# Altium PCB PCB1.PcbDoc
Units mil, origin at the board's own origin, x right, y up, seen from the top; angles counter-clockwise.
Board outline 4500 x 2355 mil, 2 copper layers (Top Layer, Bottom Layer); 17 components, 28 nets, 94 pads, 2 vias.
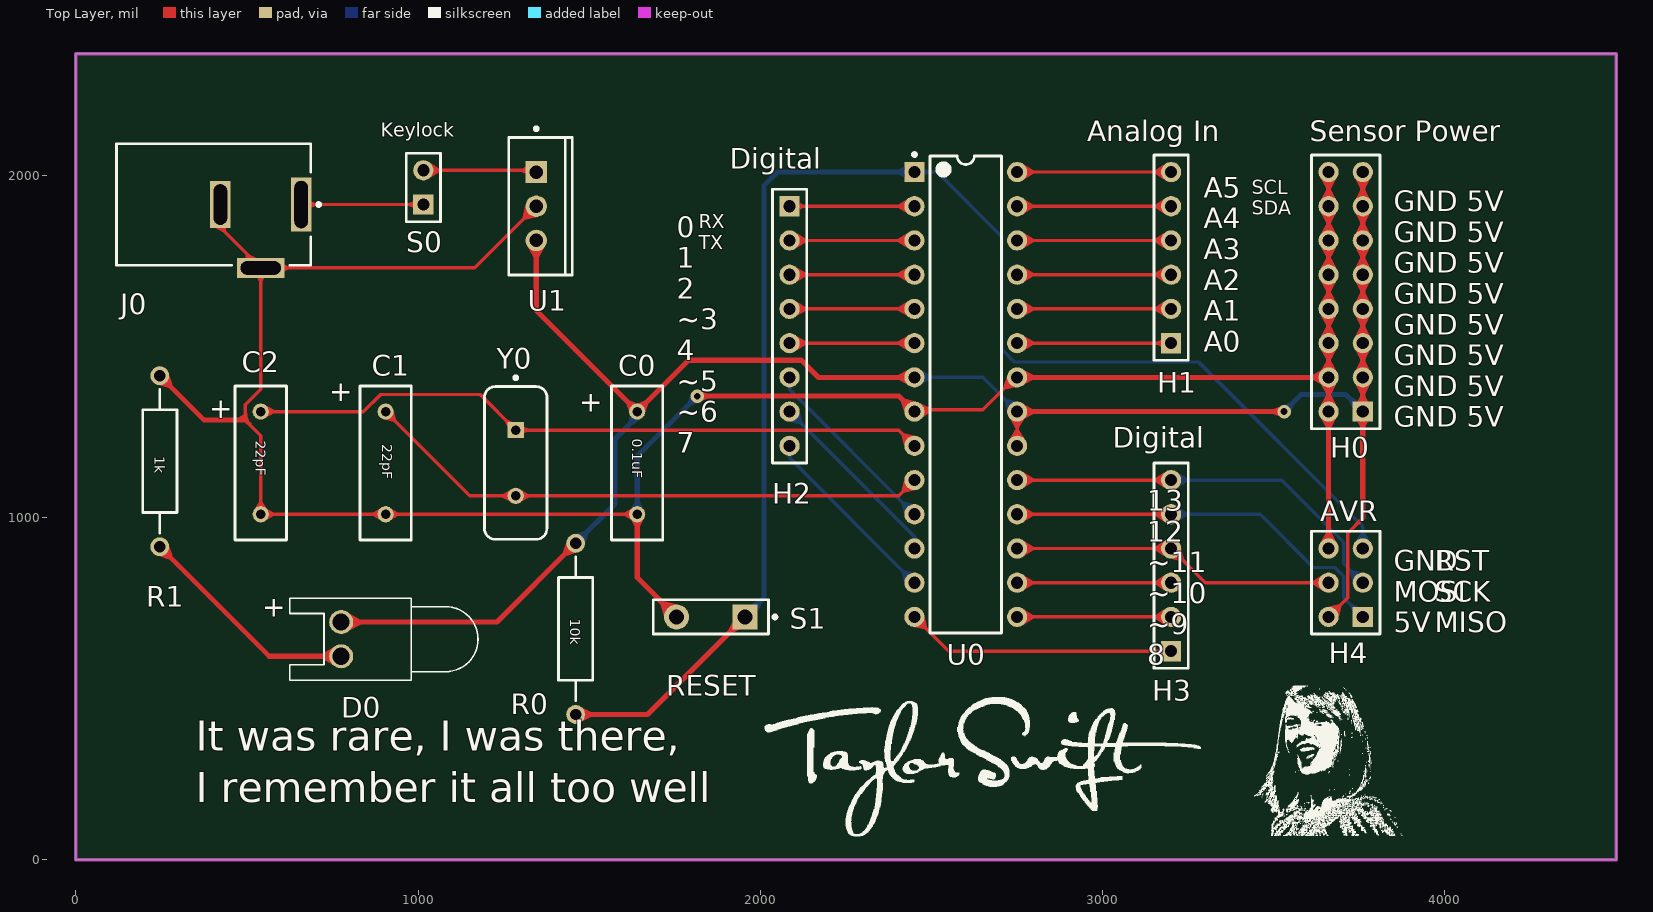
[diagram p0: Top Layer view]
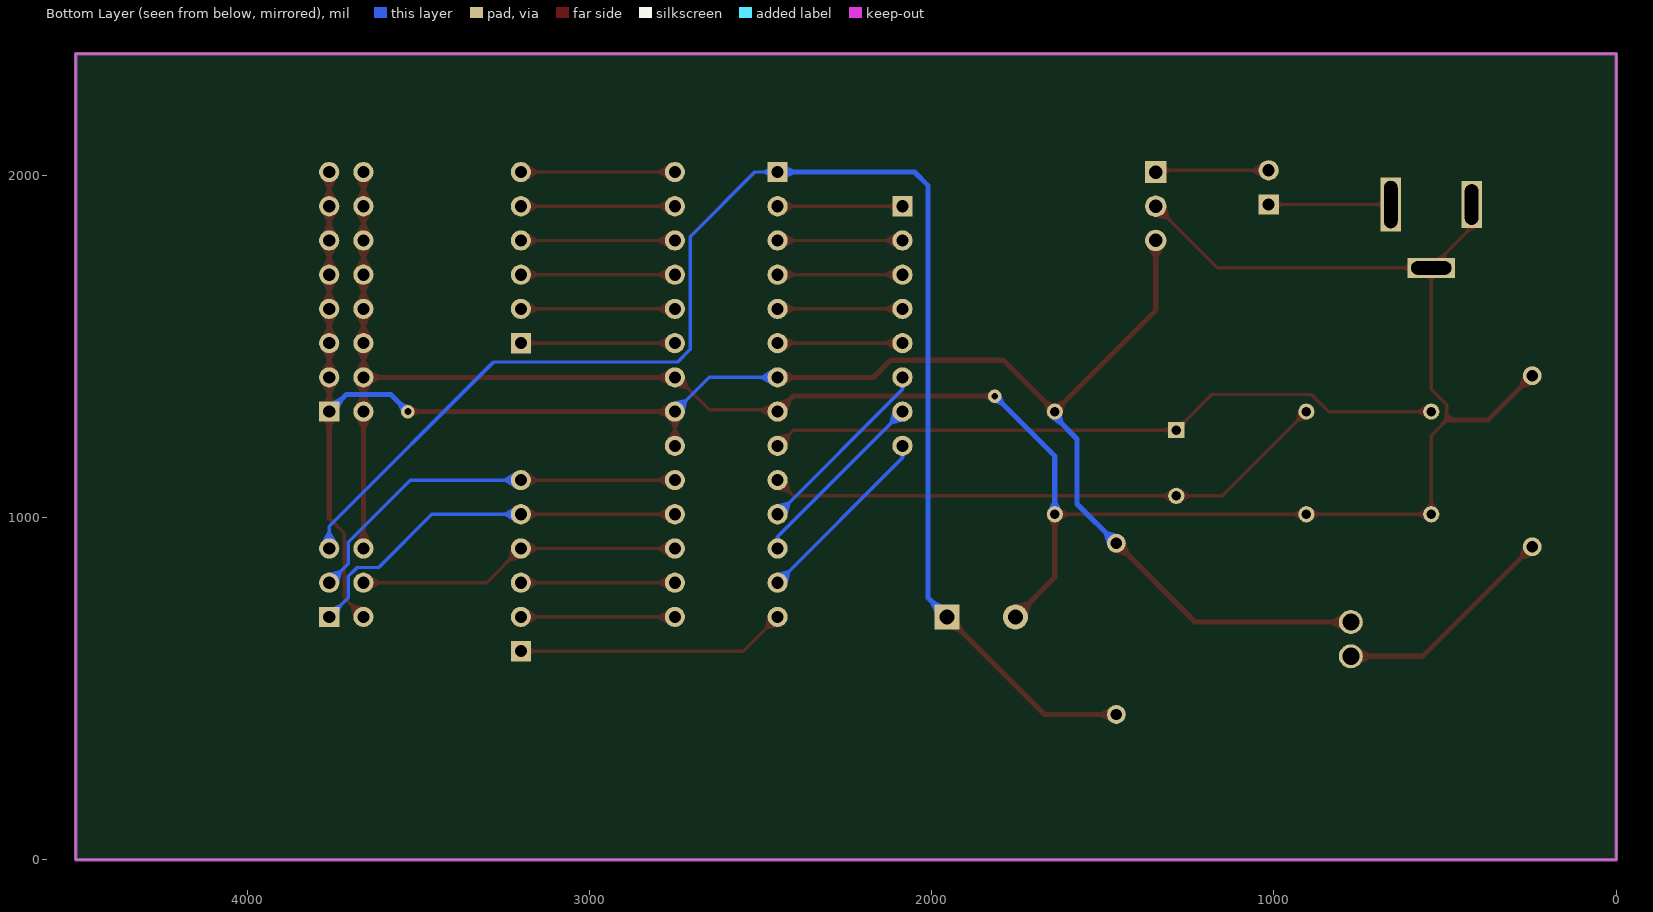
[diagram p1: Bottom Layer view, seen from below]

## Layer stack, top to bottom
Top Solder: solder mask 0.4, Solder Resist, Dk 3.5
Top Layer: signal copper 1.4
Dielectric 1: dielectric 12.6, FR-4, Dk 4.8
Bottom Layer: signal copper 1.4
Bottom Solder: solder mask 0.4, Solder Resist, Dk 3.5

## Board outline
0,0 0,2355 4500,2355 4500,0

## Design rules (kind name [scope] priority, off if disabled: settings)
BoardOutlineClearance [All] p1: gap=7.87 ignorepadtopadclearanceinfootprint=FALSE except(15.75: Arc-SplitBarrior Arc-SplitContinuation Track-SplitBarrior Track-SplitContinuation SMDPad-SplitBarrior SMDPad-SplitContinuation THPad-SplitBarrior THPad-SplitContinuation Via-SplitBarrior Via-SplitContinuation Fill-SplitBarrior Fill-SplitContinuation Poly-SplitBarrior Poly-SplitContinuation Region-SplitBarrior Region-SplitContinuation Text-SplitBarrior Text-SplitContinuation)
Clearance "Clearance Bottom Layer" [OnLayer('Bottom Layer')] p1: gap=8 ignorepadtopadclearanceinfootprint=TRUE except(10: Arc-Text Track-Text SMDPad-Text THPad-Text Via-Text Fill-Text Poly-Text Region-Text Text-Text)
Clearance "Clearance Top Layer" [OnLayer('Top Layer')] p2: gap=8 ignorepadtopadclearanceinfootprint=TRUE except(10: Arc-Text Track-Text SMDPad-Text THPad-Text Via-Text Fill-Text Poly-Text Region-Text Text-Text)
Clearance [All] p3: gap=7.87 ignorepadtopadclearanceinfootprint=FALSE except(3.5: Arc-Arc Arc-Track Arc-SMDPad Track-Track Track-SMDPad SMDPad-SMDPad; 5: Arc-Via Track-Via SMDPad-Via THPad-Via Via-Via; 10: Arc-Text Track-Text SMDPad-Text THPad-Text Via-Text Fill-Text Poly-Text Region-Text Text-Text)
HoleSize [All] p1: absolutevalues=TRUE maxlimit=248.03 minlimit=7.87 maxpercent=80.000 minpercent=20.000
MinimumAnnularRing [All] p1: minimumring=3
MinimumSolderMaskSliver [All] p1: minsoldermaskwidth=3.94
PolygonConnect PolygonConnect_1 [All] p1: thpad.connectstyle=Relief thpad.reliefconductorwidth=20 thpad.reliefentries=4 thpad.polygonreliefangle="90 Angle" thpad.airgapwidth=10 smdpad.connectstyle=Relief smdpad.reliefconductorwidth=20 smdpad.reliefentries=4 smdpad.polygonreliefangle="90 Angle" smdpad.airgapwidth=10 via.connectstyle=Direct via.reliefconductorwidth=20 via.reliefentries=4 via.polygonreliefangle="90 Angle" via.airgapwidth=10
RoutingCorners [All] p1: cornerstyle=Round minsetback=100 maxsetback=100
RoutingVias [All] p1: holewidth=19.68 width=39.37 viastyle="Through Hole" minholewidth=7.87 minwidth=17.72 maxholewidth=39.37 maxwidth=78.74
SilkToSilkClearance [All] p1: silktosilkclearance=3.94
SilkToSolderMaskClearance [IsPad] p1: minsilkscreentomaskgap=3.94 clearancetoexposedcopper=TRUE
SolderMaskExpansion [All] p1: expansion=4 istentingtop=FALSE
Width [All] p1: maxlimit=100 minlimit=3.5 preferedwidth=15
25 further rules are at their usual default settings.

## Components (designator, comment, footprint, x,y, rotation, side; value= is the part's Value field where it differs from the comment)
C0 "Cap" RAD-0.3 1640,1160 r90 top value=0.1uF
C1 "Cap" RAD-0.3 905,1160 r90 top value=22pF
C2 "Cap" RAD-0.3 540,1160 r90 top value=22pF
D0 "LED0" LED-0 775,645 r90 top
H0 "Header 8X2" HDR2X8 3760,1310 r90 top
H1 "Header 6" HDR1X6 3200,1510 r90 top
H2 "Header 8" HDR1X8 2085,1910 r270 top
H3 "Header 6" HDR1X6 3200,610 r90 top
H4 "Header 3X2" HDR2X3 3760,710 r90 top
J0 "PJ-002A" CUI-PJ-002A_V 540,1915 r180 top
R0 "Res1" AXIAL-0.5 1460,675 r90 top value=10K
R1 "Res1" AXIAL-0.5 245,1165 r270 top value=1K
S0 "Keylock" HDR1X2 1015,1915 r90 top
S1 "SW-SPST" SPST-2 1855,710 r180 top
U0 "ATmega328-PU" 28P3 2600,1360 r0 top
U1 "LM7805CT" FAIR-TO-220-3 1345,1910 r0 top
Y0 "16MHz" FOX-FOXSLF160-20 1285,1160 r270 top

## Footprints (in the part's own frame and the unit in brackets; to place one, negate y for a bottom-side part, rotate by r counter-clockwise, add the part's x,y. Pads: shape width x height; smd on the part's side, far side on the other; paste and mask are expansions set on the pad)
28P3 [mm] "28-Pin Plastic Dual In-Line Package (PDIP)"
  rect 1.5x1.5 hole 0.9: 1(-3.81,16.51)
  round 1.5 hole 0.9: 2(-3.81,13.97) 3(-3.81,11.43) 4(-3.81,8.89) 5(-3.81,6.35) 6(-3.81,3.81) 7(-3.81,1.27) 8(-3.81,-1.27) 9(-3.81,-3.81) 10(-3.81,-6.35) 11(-3.81,-8.89) 12(-3.81,-11.43) 13(-3.81,-13.97) 14(-3.81,-16.51) 15(3.81,-16.51) 16(3.81,-13.97) 17(3.81,-11.43) 18(3.81,-8.89) 19(3.81,-6.35) 20(3.81,-3.81) 21(3.81,-1.27) 22(3.81,1.27) 23(3.81,3.81) 24(3.81,6.35) 25(3.81,8.89) 26(3.81,11.43) 27(3.81,13.97) 28(3.81,16.51)
  silkscreen extent -3.93,-17.7 2.65,17.93, body extent -3.6,-17.65 3.6,17.65, height 4.58
AXIAL-0.5 [mm] "Axial Device, Thru-Hole; 2 Leads; 0.5 in Pin Spacing"
  round 1.4 hole 0.85: 1(-6.35,0) 2(6.35,0)
  silkscreen extent -5.33,-1.27 5.33,1.27
CUI-PJ-002A_V [mm] "THD, 3-Leads, Body 14.4x9mm, Height 11mm"
  rect 1.5x4 hole 1 slot 3.5 at 90 deg: 1(-3,0)
  rect 1.5x3.5 hole 1 slot 3 at 90 deg: 2(3,0)
  rect 3.5x1.5 hole 1 slot 3 at 0 deg: 3(0,4.7)
  silkscreen extent -4.43,-4.5 10.7,4.5, body extent -3.7,-4.5 10.7,4.9, height 11
FAIR-TO-220-3 [mm] "FM, 3-Leads, Body 10.2x4.7mm, Pitch 2.54mm"
  rect 1.6x1.6 hole 1: 1(0,2.54)
  round 1.6 hole 1: 2(0,0) 3(0,-2.54)
  silkscreen extent -2.04,-5.1 2.66,5.87, body extent -2.04,-5.1 2.66,5.1, height 18.95
FOX-FOXSLF160-20 [mm] "THD, 2-Leads, Body 11.35x4.65mm"
  rect 1.2x1.2 hole 0.7: 1(-2.44,0)
  round 1.2 hole 0.7: 2(2.44,0)
  silkscreen extent -6.45,-2.32 5.68,2.32, body extent -5.67,-2.32 5.68,2.33, height 3.6
HDR1X2 [mm] "Connector; Header; 2 Position"
  rect 1.5x1.5 hole 0.9: 1(0,0)
  round 1.5 hole 0.9: 2(2.54,0)
  silkscreen extent -1.27,-1.27 3.81,1.27
HDR1X6 [mm] "Connector; Header; 6 Position"
  rect 1.5x1.5 hole 0.9: 1(0,0)
  round 1.5 hole 0.9: 2(2.54,0) 3(5.08,0) 4(7.62,0) 5(10.16,0) 6(12.7,0)
  silkscreen extent -1.27,-1.27 13.97,1.27
HDR1X8 [mm] "Connector; Header; 8 Position"
  rect 1.5x1.5 hole 0.9: 1(0,0)
  round 1.5 hole 0.9: 2(2.54,0) 3(5.08,0) 4(7.62,0) 5(10.16,0) 6(12.7,0) 7(15.24,0) 8(17.78,0)
  silkscreen extent -1.27,-1.27 19.05,1.27
HDR2X3 [mm] "Connector; Header; 3x2 Position"
  rect 1.5x1.5 hole 0.9: 1(0,0)
  round 1.5 hole 0.9: 2(0,2.54) 3(2.54,0) 4(2.54,2.54) 5(5.08,0) 6(5.08,2.54)
  silkscreen extent -1.27,-1.27 6.35,3.81
HDR2X8 [mm] "Connector; Header; 8x2 Position"
  rect 1.5x1.5 hole 0.9: 1(0,0)
  round 1.5 hole 0.9: 2(0,2.54) 3(2.54,0) 4(2.54,2.54) 5(5.08,0) 6(5.08,2.54) 7(7.62,0) 8(7.62,2.54) 9(10.16,0) 10(10.16,2.54) 11(12.7,0) 12(12.7,2.54) 13(15.24,0) 14(15.24,2.54) 15(17.78,0) 16(17.78,2.54)
  silkscreen extent -1.27,-1.27 19.05,3.81
LED-0 [mil] "LED; 2 Leads"
  round 70 hole 50: 1(50,0) 2(-50,0)
  silkscreen extent -120,-400 120,150
RAD-0.3 [mm] "Radial Cap, Thru-Hole; 2 Leads; 0.3 in Pin Spacing"
  round 1.2 hole 0.7: 1(-3.81,0) 2(3.81,0)
  silkscreen extent -5.71,-1.91 5.71,1.91
SPST-2 [mm] "Switch; 2 Leads"
  rect 1.85x1.85 hole 1.1: 1(-2.54,0)
  round 1.85 hole 1.1: 2(2.54,0)
  silkscreen extent -4.89,-1.27 4.28,1.27

## Part data
C0 C1 C2: "Capacitor", LatestRevisionDate=17-Jul-2002, LatestRevisionNote="Re-released for DXP Platform.", PackageDescription="Radial Cap, Thru-Hole; 2 Leads; 0.3 in Pin Spacing", PackageReference=RAD-0.3, Published=8-Jun-2000, Publisher="Altium Limited"
D0: "Typical INFRARED GaAs LED", LatestRevisionDate=08-Jul-2005, LatestRevisionNote="Mech Layer 1 removed.", PackageDescription="LED; 2 Leads", PackageReference=LED-0, Published=8-Jun-2000, Publisher="Altium Limited"
H0: "Header, 8-Pin, Dual row", LatestRevisionDate=17-Jul-2002, LatestRevisionNote="Re-released for DXP Platform.", Publisher="Altium Limited"
H1 H3: "Header, 6-Pin", LatestRevisionDate=17-Jul-2002, LatestRevisionNote="Re-released for DXP Platform.", Publisher="Altium Limited"
H2: "Header, 8-Pin", LatestRevisionDate=17-Jul-2002, LatestRevisionNote="Re-released for DXP Platform.", Publisher="Altium Limited"
H4: "Header, 3-Pin, Dual row", LatestRevisionDate=17-Jul-2002, LatestRevisionNote="Re-released for DXP Platform.", Publisher="Altium Limited"
J0: library part CMP-2000-06895-2, "Through Hole Right Angle DC Power Jack, 2.5 A, 2 mm Center Pin, 3 Position, -25 to 85 degC, RoHS, Bulk", Current Rating=2.5A, Flammability Rating=UL94V-0, Insulation Resistance=50MOhms, Manufacturer=CUIInc., Operating Temperature Range=-25Cto+85C, Package Description="3-Pin Through Hole Device, Body 14.4 x 9 mm, Height 11 mm", Voltage Rating=24V, Brand=CUI, Connector Type=DCPowerJack, Contact Gender=Male, Contact Material=Copper, Contact Plating=Nickel, Datasheet URL=http://www.cui.com/product/resource/pj-002a.pdf, Datasheet Version="Rev. 1.03, 04/2016", Factory Pack Quantity=500, Housing Material=PolybutyleneTerephthalate(PBT), Inside Contact Diameter=2mm, Manufacturer URL=http://www.cui.com/, Mounting Angle=Right, Mounting Style=ThroughHole, Mounting Technology=ThroughHole, Outside Contact Diameter=6.5mm, Package Reference=PJ-002A, Product=Jacks, Product Category=DCPowerConnectors, RoHS=True, Termination Style=ThroughHole
R0 R1: "Resistor", LatestRevisionDate=17-Jul-2002, LatestRevisionNote="Re-released for DXP Platform.", PackageDescription="Axial Device, Thru-Hole; 2 Leads; 0.3 in Pin Spacing", PackageReference=AXIAL-0.3, Published=8-Jun-2000, Publisher="Altium Limited"
S0: library part "Header 2", "Header, 2-Pin", LatestRevisionDate=17-Jul-2002, LatestRevisionNote="Re-released for DXP Platform.", Publisher="Altium Limited"
S1: "Single-Pole, Single-Throw Switch", LatestRevisionDate=17-Jul-2002, LatestRevisionNote="Re-released for DXP Platform.", PackageDescription="Switch; 2 Leads", PackageReference=SPST-2, Published=24-Mar-1999, Publisher="Altium Limited"
U0: library part CMP-0095-00015-2, "8-bit AVR Microcontroller, 32KB Flash, 1KB EEPROM, 2KB SRAM, 28-pin PDIP, Industrial Grade (-40°C to 85°C)", ComponentLink1Description="Manufacturer URL", ComponentLink1URL=http://www.atmel.com/, ComponentLink2Description="ATmega48A/48PA/88A/88PA/168A/168PA/328/328P Datasheet", ComponentLink2URL=http://www.atmel.com/dyn/resources/prod_documents/8271.pdf, ComponentLink3Description="ATmega48A/48PA/88A/88PA/168A/168PA/328/328P Summary", ComponentLink3URL=http://www.atmel.com/dyn/resources/prod_documents/8271S.pdf, DatasheetVersion="revD, May-2011", PackageDescription="28-lead (0.300\"/7.62mm Wide) Plastic Dual Inline Package (PDIP)", PackageReference=28P3, PackageVersion="revB, Sep-2001", RevisionNote="DatasheetVersion updated. URLs added."
U1: library part CMP-2000-04938-1, "Positive Voltage Regulator, 5 V, 1 A, -40 to 125 degC, 3-Pin TO-220, RoHS, Tube", Manufacturer=FairchildSemiconductor, Maximum Input Voltage=35V, Maximum Output Current=2.2(Typ)A, Maximum Quiescent Current=8mA, Operating Temperature=-40to125degC, Output Voltage=5V, Package=3TO-220AB, Package Description="3-Pin Through Hole Device, Body 10 x 4.5 mm, Pitch 2.54 mm", Package Reference=TO-220, Typical Dropout Voltage @ Current=2@1AV, Accuracy=±4%, Category=LinearRegulator, Datasheet URL=https://datasheet.ciiva.com/26904/lm7805ct-26904988.pdf, Datasheet Version=Aug-12, Line Regulation=100mV, Load Regulation=100mV, Manufacturer URL=https://www.fairchildsemi.com/, Mounting=ThroughHole, Number of Outputs=1, Output Type=Fixed, Package URL=https://www.fairchildsemi.com/package-drawings/TO/TO220B03.pdf, Packaging=Rail/Tube, Polarity=Positive, Rad Hard=No, Type=Linear
Y0: library part CMP-1749-00003-1, "Resistance Weld Thru-Hole Crystal, 16 MHz, -20 to 70 degC, 2-Pin THD, RoHS, Bulk", Case\Package=Axial, Max Operating Temperature="155 degC", Min Operating Temperature="-55 degC", Package Quantity=200, Power Rating="250 mW", Resistance="221 kohm", Tolerance=1%, Voltage Rating="250 V", ComponentLink1Description="Manufacturer URL", ComponentLink1URL=http://www.foxonline.com/, ComponentLink2Description=Datasheet, ComponentLink2URL=http://www.foxonline.com/pdfs/hc49slf.pdf, DatasheetVersion=Mar-15, Length="0.248 inch", Mount="Through Hole", PackageDescription="2-Pin Through Hole Device, Body 11.35 x 4.65 mm", PackageReference=FOXSLF160-20, Packaging=Bulk, RoHSCompliant=true

## Via types
v1: diameter 39.37, hole 19.68, Top Layer to Bottom Layer, 2 vias

## Nets (pads, with @x,y where several pads share a name; then routed paths per layer and width w, separated by ;. In a path a pad name is that pad's centre, name@x,y a point inside that pad or via, vN(x,y) a via of type N, cw(c..) or ccw(c..) an arc to the next point about the centre after c; other vN are vias at no path point)
5V: C0.2 D0.1 H0.1 H0.3 H0.5 H0.7 H0.9 H0.11 H0.13 H0.15 H4.2 R0.2 U0.7 U0.20 U0.21 U1.3 | length 5589.1
  Top Layer w10: U0.20 U0.21 ; H4.2 3715.47,765.47 3715.47,954.53 3760,999.06
  Top Layer w15: D0.1 1230,695 R0.2 ; U1.3 1345,1605 C0.2 1790,1460 2120,1460 2170,1410 U0.7 ; U0.21 v1(3530,1310) ; 3760,999.06 H0.1 H0.3 H0.5 H0.7 H0.9 H0.11 H0.13 H0.15
  Bottom Layer w10: U0.7 2650,1410 U0.21
  Bottom Layer w15: R0.2 1575,1040 1575,1230 1633.83,1288.83 1633.83,1303.83 C0.2 ; v1(3530,1310) 3580,1360 3710,1360 H0.1
GND: C0.1 C1.1 C2.1 H0.2 H0.4 H0.6 H0.8 H0.10 H0.12 H0.14 H0.16 H4.6 J0.2 J0.3 R1.1 S1.2 U0.8 U0.22 U1.2 | length 7044.8
  Top Layer w10: J0.2 421.89,1848.07 J0.3 ; U1.2 1164.96,1729.96 J0.3 ; C0.1 C1.1 C2.1 540,1240 495,1285 495,1330 540,1375 J0.3 ; U0.8 2455,1315 2650,1315 2745,1410 U0.22
  Top Layer w15: R1.1 375,1285 495,1285 ; C0.1 1640,825 S1.2 ; v1(1815,1355) 2404.97,1355.03 U0.8 ; U0.22 H0.4 ; H4.6 H0.2 H0.4 ; H0.16 H0.14 H0.12 H0.10 H0.8 H0.6 H0.4
  Bottom Layer w15: C0.1 1640,1180 v1(1815,1355)
MISO: H3.5 H4.1 U0.18 | length 1171.2
  Top Layer w10: U0.18 H3.5
  Bottom Layer w10: H3.5 3460,1010 3615.47,854.53 3678.44,854.53 3704.53,828.44 3704.53,765.47 H4.1
MOSI: H3.4 H4.4 U0.17 | length 951.4
  Top Layer w10: U0.17 H3.4 3300,810 H4.4
NetD0_2: D0.2 R1.2 | length 662.5
  Top Layer w15: R1.2 565,595 D0.2
NetH1_1: H1.1 U0.23 | length 450
  Top Layer w10: U0.23 H1.1
NetH1_2: H1.2 U0.24 | length 450
  Top Layer w10: U0.24 H1.2
NetH1_3: H1.3 U0.25 | length 450
  Top Layer w10: U0.25 H1.3
NetH1_4: H1.4 U0.26 | length 450
  Top Layer w10: U0.26 H1.4
NetH1_5: H1.5 U0.27 | length 450
  Top Layer w10: U0.27 H1.5
NetH1_6: H1.6 U0.28 | length 450
  Top Layer w10: U0.28 H1.6
NetH2_1: H2.1 U0.2 | length 365
  Top Layer w10: H2.1 U0.2
NetH2_2: H2.2 U0.3 | length 365
  Top Layer w10: H2.2 U0.3
NetH2_3: H2.3 U0.4 | length 365
  Top Layer w10: H2.3 U0.4
NetH2_4: H2.4 U0.5 | length 365
  Top Layer w10: H2.4 U0.5
NetH2_5: H2.5 U0.6 | length 365
  Top Layer w10: H2.5 U0.6
NetH2_6: H2.6 U0.11 | length 551.2
  Bottom Layer w10: H2.6 2085,1375 U0.11
NetH2_7: H2.7 U0.12 | length 551.2
  Bottom Layer w10: H2.7 2450,945 U0.12
NetH2_8: H2.8 U0.13 | length 551.2
  Bottom Layer w10: H2.8 2085,1175 U0.13
NetH3_1: H3.1 U0.14 | length 791.4
  Top Layer w10: U0.14 2550,610 H3.1
NetH3_2: H3.2 U0.15 | length 450
  Top Layer w10: U0.15 H3.2
NetH3_3: H3.3 U0.16 | length 450
  Top Layer w10: U0.16 H3.3
NetS0_2: S0.2 U1.1 | length 332.1
  Top Layer w10: S0.2 1340,2015 U1.1
RST: H4.5 R0.1 S1.1 U0.1 | length 4348.9
  Top Layer w15: R0.1 1670,425 S1.1
  Bottom Layer w10: U0.1 2516.13,2010 2705.47,1820.65 2705.47,1491.56 2742.03,1455 3280,1455 3760,975 H4.5
  Bottom Layer w15: S1.1 2010,765 2010,1970 2050,2010 U0.1
SCK: H3.6 H4.3 U0.19 | length 1171.2
  Top Layer w10: U0.19 H3.6
  Bottom Layer w10: H3.6 3522.97,1110 3704.53,928.44 3704.53,865.47 H4.3
VCC: J0.1 S0.1 | length 356.9
  Top Layer w10: J0.1 S0.1
XTAL1: C2.2 U0.9 Y0.1 | length 1992.8
  Top Layer w10: C2.2 840,1310 890,1360 1181.06,1360 Y0.1 2403.94,1256.06 U0.9
XTAL2: C1.2 U0.10 Y0.2 | length 1666
  Top Layer w10: C1.2 1151.06,1063.94 Y0.2 2403.94,1063.94 U0.10

## Keep-outs
Keep-Out Layer:
  the board outline again, w10

## Silkscreen, mask and mechanical layers (free items; w line width, h text height)
Top Overlay:
  drawing of 1262 lines, arcs and shapes, not listed
  text "Keylock" at 890,2113.33 h40
  text "Analog In" at 2955,2099.99 h60
  text "Sensor Power" at 3605,2100 h60
  text "Digital" at 1910,2019.99 h60
  text "SCL / SDA" at 3435,1885 h40
  text "RX / TX" at 1820,1785 h40
  text "A5 / A4 / A3 / A2 / A1 / A0" at 3295,1485 h60
  text "+" at 740,1340 h60
  text "+" at 1470,1310 h60
  text "+" at 390,1290 h60
  text "GND 5V / GND 5V / GND 5V / GND 5V / GND 5V / GND 5V / GND 5V / GND 5V" at 3850,1265 h60
  text "0.1uF" at 1625,1230 h30 r270
  text "22pF" at 525,1225 h30 r270
  text "22pF" at 895,1215 h30 r270
  text "Digital" at 3030,1204.99 h60
  text "0 / 1 / 2 / ~3 / 4 / ~5 / ~6 / 7" at 1755,1190 h60
  text "1k" at 230,1180 h30 r270
  text "AVR" at 3635,990 h60
  text "+" at 545,710 h60
  text "10k" at 1445,705 h30 r270
  text "GND / MOSI / 5V" at 3850,665 h60
  text "RST / SCK / MISO" at 3970.1,665 h60
  text "13 / 12 / ~11 / ~10 / ~9 / 8" at 3130.1,570 h60
  text "RESET" at 1725,480 h60
  text "It was rare, I was there,  / I remember it all too well" at 350,140 h150